# Altium PCB DeejBusinessCard.PcbDoc
Units mm, origin at the board's own origin, x right, y up, seen from the top; angles counter-clockwise.
Board outline 90 x 50 mm, 2 copper layers (Top Layer, Bottom Layer), stack 1.18 mm thick; 106 components, 73 nets, 382 pads, 92 vias.
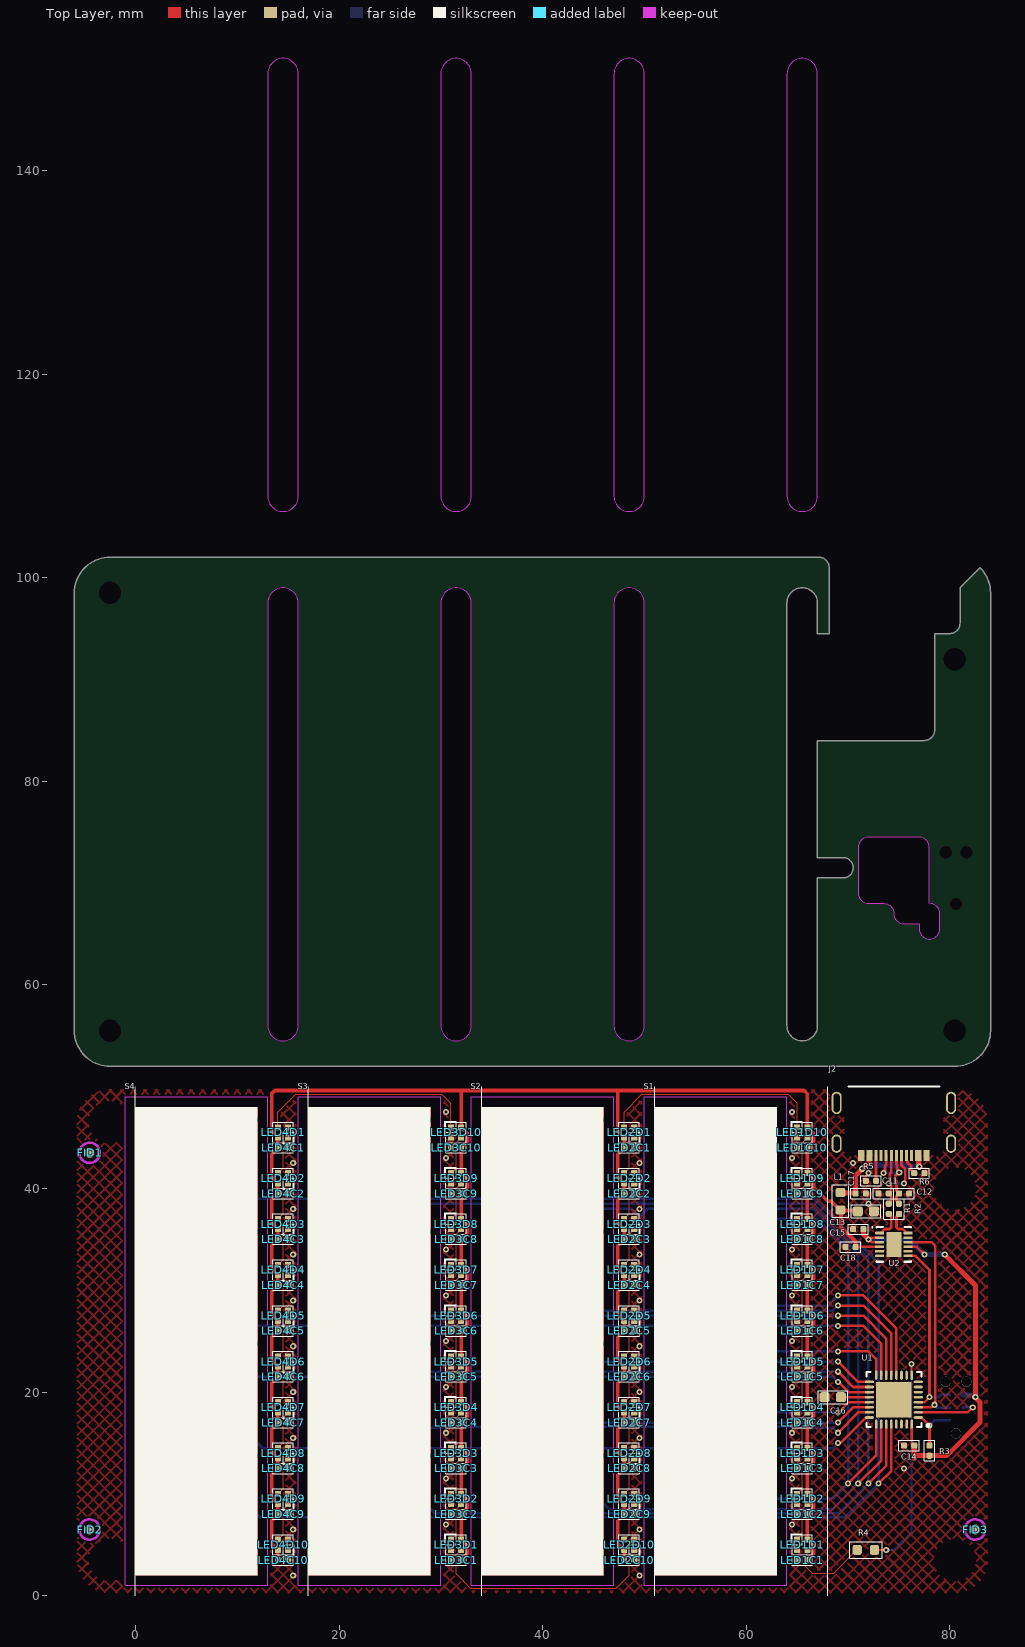
[diagram p0: Top Layer view]
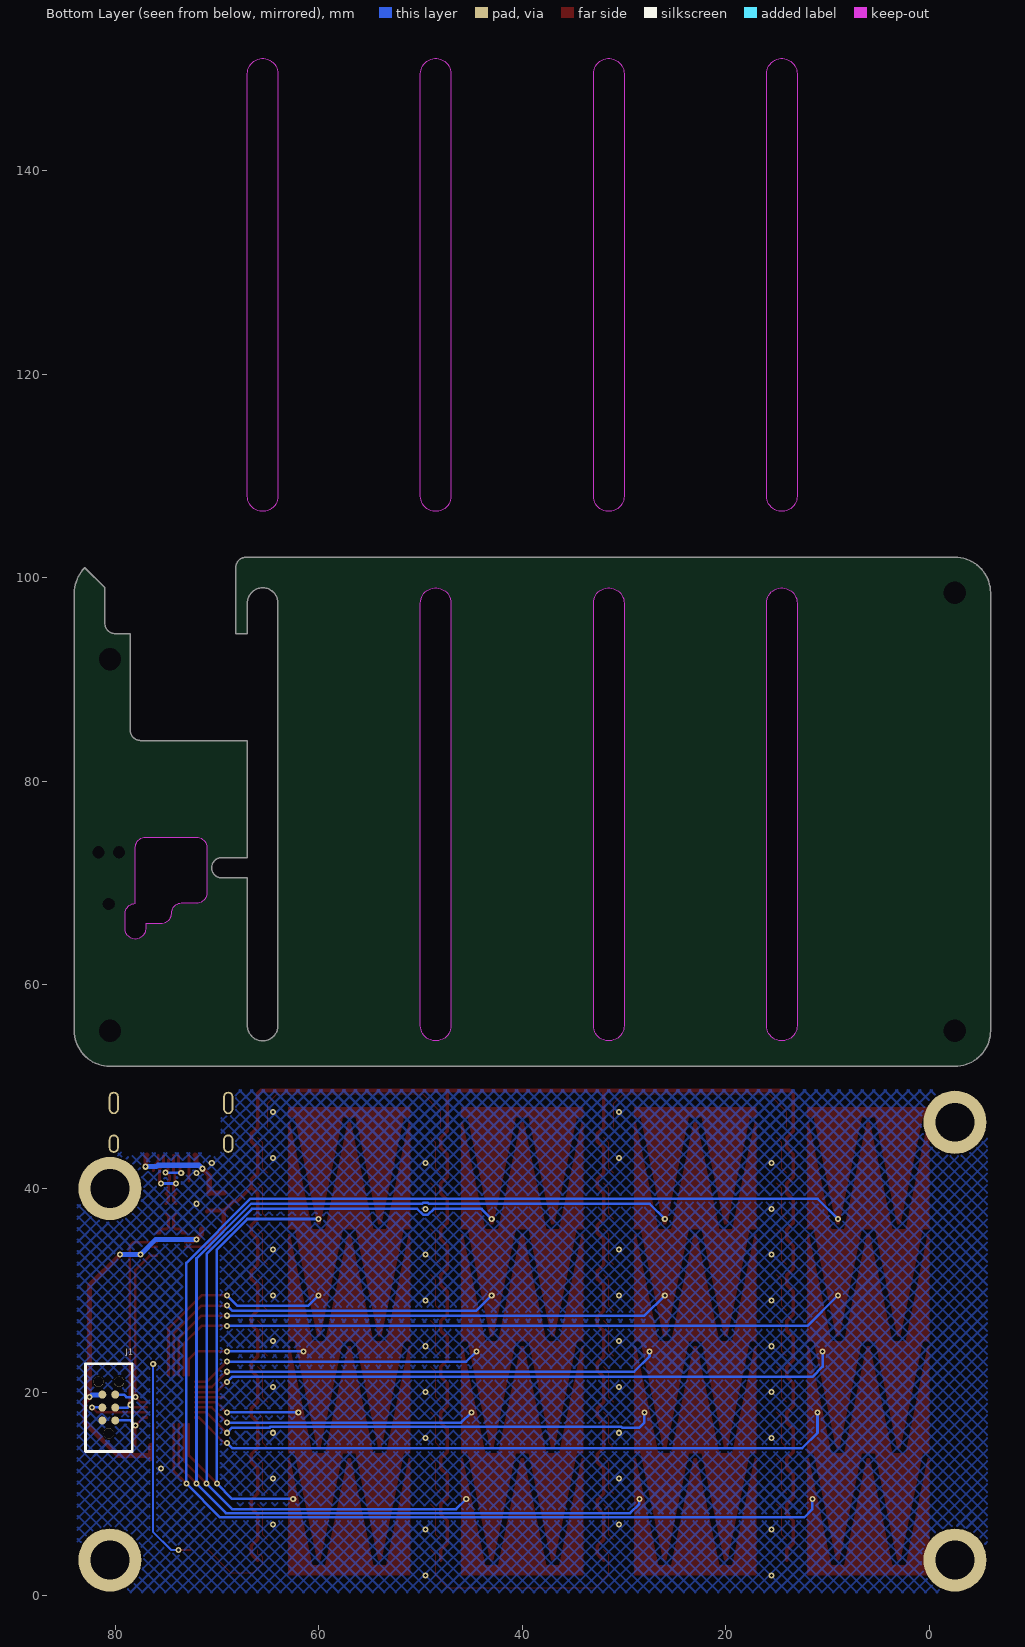
[diagram p1: Bottom Layer view, seen from below]

## Layer stack, top to bottom
Top Solder: solder mask 0.01, Solder Resist, Dk 3.5
Top Layer: signal copper 0.035
Dielectric 2: dielectric 1.11, FR-4, Dk 4.8
Bottom Layer: signal copper 0.035
Bottom Solder: solder mask 0.01, Solder Resist, Dk 3.5

## Board outline
84,55.5 84,98.5 ccw(c80.5,98.5) 82.975,100.975 81,99 81,95.5 cw(c80,95.5) 80,94.5 78.5,94.5 78.5,85 cw(c77.5,85) 77.5,84 67,84 67,72.5 69.5,72.5 cw(c69.5,71.5) 69.5,70.5 67,70.5 67,56 cw(c65.5,56) 64,56 64,97.5 cw(c65.5,97.5) 67,97.5 67,94.5 68.14,94.5 68.14,101 ccw(c67.14,101) 67.14,102 -2.5,102 ccw(c-2.5,98.5) -6,98.5 -6,55.5 ccw(c-2.5,55.5) -2.5,52 80.5,52 ccw(c80.5,55.5)
cut-out: 64,108 ccw(c65.5,108) 67,108 67,149.5 ccw(c65.5,149.5) 64,149.5
cut-out: 47,108 ccw(c48.5,108) 50,108 50,149.5 ccw(c48.5,149.5) 47,149.5
cut-out: 30,108 ccw(c31.5,108) 33,108 33,149.5 ccw(c31.5,149.5) 30,149.5
cut-out: 13,108 ccw(c14.5,108) 16,108 16,149.5 ccw(c14.5,149.5) 13,149.5
cut-out: 13,56 ccw(c14.5,56) 16,56 16,97.5 ccw(c14.5,97.5) 13,97.5
cut-out: 30,56 ccw(c31.5,56) 33,56 33,97.5 ccw(c31.5,97.5) 30,97.5
cut-out: 47,56 ccw(c48.5,56) 50,56 50,97.5 ccw(c48.5,97.5) 47,97.5
cut-out: 71,69 ccw(c72,69) 72,68 73.5,68 cw(c73.5,67) 74.5,67 ccw(c75.5,67) 75.5,66 77,66 77,65.5 ccw(c78,65.5) 79,65.5 79,67 ccw(c78,67) 78,68 78,73.5 ccw(c77,73.5) 77,74.5 72,74.5 ccw(c72,73.5) 71,73.5
board region "Layer Stack Region 3": -6,3.5 -6,46.5 -6,46.729 -5.94,47.184 -5.821,47.627 -5.646,48.051 -5.416,48.449 -5.137,48.813 -4.813,49.137 -4.449,49.416 -4.051,49.646 -3.627,49.821 -3.184,49.94 -2.729,50 -2.5,50 69.88,50 69.88,43.8 69.888,43.722 69.947,43.578 70.058,43.467 70.202,43.408 70.358,43.408 70.502,43.467 70.613,43.578 70.672,43.722 70.68,43.8 78.32,43.8 78.328,43.722 78.387,43.578 78.498,43.467 78.642,43.408 78.798,43.408 78.942,43.467 79.053,43.578 79.112,43.722 79.12,43.8 79.12,50 80.5,50 80.729,50 81.184,49.94 81.627,49.821 82.051,49.646 82.449,49.416 82.813,49.137 83.137,48.813 83.416,48.449 83.646,48.051 83.821,47.627 83.94,47.184 84,46.729 84,46.5 84,3.5 84,3.271 83.94,2.816 83.821,2.373 83.646,1.949 83.416,1.551 83.137,1.187 82.813,0.863 82.449,0.584 82.051,0.354 81.627,0.179 81.184,0.06 80.729,0 80.5,0 -2.5,0 -2.729,0 -3.184,0.06 -3.627,0.179 -4.051,0.354 -4.449,0.584 -4.813,0.863 -5.137,1.187 -5.416,1.551 -5.646,1.949 -5.821,2.373 -5.94,2.816 -6,3.271
board region "Layer Stack Region 2": -6,107.5 -6,107.271 -5.94,106.816 -5.821,106.373 -5.646,105.949 -5.416,105.551 -5.137,105.187 -4.813,104.863 -4.449,104.584 -4.051,104.354 -3.627,104.179 -3.184,104.06 -2.729,104 -2.5,104 80.5,104 80.729,104 81.184,104.06 81.627,104.179 82.051,104.354 82.449,104.584 82.813,104.863 83.137,105.187 83.416,105.551 83.646,105.949 83.821,106.373 83.94,106.816 84,107.271 84,107.5 84,150.5 84,150.729 83.94,151.184 83.821,151.627 83.646,152.051 83.416,152.449 83.137,152.813 82.813,153.137 82.449,153.416 82.051,153.646 81.627,153.821 81.184,153.94 80.729,154 80.5,154 80.12,154 80.022,154 79.828,153.962 79.646,153.886 79.483,153.777 79.343,153.637 79.234,153.474 79.158,153.292 79.12,153.098 79.12,153 79.12,148.3 79.115,148.202 79.077,148.01 79.002,147.829 78.893,147.666 78.754,147.527 78.591,147.418 78.41,147.343 78.218,147.305 78.12,147.3 70.88,147.3 70.782,147.305 70.59,147.343 70.409,147.418 70.246,147.527 70.107,147.666 69.998,147.829 69.923,148.01 69.885,148.202 69.88,148.3 69.88,153 69.88,153.098 69.842,153.292 69.766,153.474 69.657,153.637 69.517,153.777 69.354,153.886 69.172,153.962 68.978,154 68.88,154 -2.5,154 -2.729,154 -3.184,153.94 -3.627,153.821 -4.051,153.646 -4.449,153.416 -4.813,153.137 -5.137,152.813 -5.416,152.449 -5.646,152.051 -5.821,151.627 -5.94,151.184 -6,150.729 -6,150.5
board region "Layer Stack Region 4": 84,55.5 84,98.5 84,98.672 83.966,99.014 83.899,99.351 83.799,99.681 83.668,99.998 83.506,100.302 83.315,100.587 83.096,100.853 82.975,100.975 81,99 81,95.5 80.995,95.402 80.957,95.21 80.882,95.029 80.773,94.866 80.634,94.727 80.471,94.618 80.29,94.543 80.098,94.505 80,94.5 78.5,94.5 78.5,85 78.495,84.902 78.457,84.71 78.382,84.529 78.273,84.366 78.134,84.227 77.971,84.118 77.79,84.043 77.598,84.005 77.5,84 67,84 67,72.5 69.5,72.5 69.631,72.491 69.883,72.424 70.109,72.293 70.293,72.109 70.424,71.883 70.491,71.631 70.491,71.369 70.424,71.117 70.293,70.891 70.109,70.707 69.883,70.576 69.631,70.509 69.5,70.5 67,70.5 67,56 66.993,55.853 66.935,55.565 66.823,55.293 66.66,55.048 66.452,54.84 66.207,54.677 65.935,54.565 65.647,54.507 65.353,54.507 65.065,54.565 64.793,54.677 64.548,54.84 64.34,55.048 64.177,55.293 64.065,55.565 64.007,55.853 64,56 64,97.5 64.007,97.647 64.065,97.935 64.177,98.207 64.34,98.452 64.548,98.66 64.793,98.823 65.065,98.935 65.353,98.993 65.647,98.993 65.935,98.935 66.207,98.823 66.452,98.66 66.66,98.452 66.823,98.207 66.935,97.935 66.993,97.647 67,97.5 67,94.5 68.14,94.5 68.14,101 68.14,101.098 68.102,101.292 68.026,101.474 67.917,101.637 67.777,101.777 67.614,101.886 67.432,101.962 67.238,102 67.14,102 -2.5,102 -2.729,102 -3.184,101.94 -3.627,101.821 -4.051,101.646 -4.449,101.416 -4.813,101.137 -5.137,100.813 -5.416,100.449 -5.646,100.051 -5.821,99.627 -5.94,99.184 -6,98.729 -6,98.5 -6,55.5 -6,55.271 -5.94,54.816 -5.821,54.373 -5.646,53.949 -5.416,53.551 -5.137,53.187 -4.813,52.863 -4.449,52.584 -4.051,52.354 -3.627,52.179 -3.184,52.06 -2.729,52 -2.5,52 80.5,52 80.729,52 81.184,52.06 81.627,52.179 82.051,52.354 82.449,52.584 82.813,52.863 83.137,53.187 83.416,53.551 83.646,53.949 83.821,54.373 83.94,54.816 84,55.271

## Design rules (kind name [scope] priority, off if disabled: settings)
BoardOutlineClearance [All] p1: gap=0.2 ignorepadtopadclearanceinfootprint=FALSE
Clearance [All] p1: gap=0.15 ignorepadtopadclearanceinfootprint=FALSE
DiffPairsRouting [All] p1: maxlimit=0.22 minlimit=0.22 mostfreqgap=0.22 toplayer_minwidth=0.28 toplayer_maxwidth=0.28 toplayer_prefwidth=0.28 bottomlayer_minwidth=0.28 bottomlayer_maxwidth=0.28 bottomlayer_prefwidth=0.28 maxuncoupledlength=12.7
PolygonConnect [All] p1: connectstyle=Direct reliefconductorwidth=0.254 reliefentries=4 polygonreliefangle="90 Angle" airgapwidth=0.254
RoomDefinition LED3 [InComponentClass('LED3')] p1: confinementstyle=ConfineIn formatcopy=FALSE lockcomponents=FALSE outline 30,0 33,0 33,50 30,50
RoomDefinition LED2 [InComponentClass('LED2')] p2: confinementstyle=ConfineIn formatcopy=TRUE lockcomponents=FALSE outline 50,50 47,50 47,0 50,0
RoomDefinition LED4 [InComponentClass('LED4')] p3: confinementstyle=ConfineIn formatcopy=TRUE lockcomponents=FALSE outline 16,50 13,50 13,0 16,0
RoomDefinition LED1 [InComponentClass('LED1')] p4: confinementstyle=ConfineIn formatcopy=FALSE lockcomponents=FALSE outline 64,0 67,0 67,50 64,50
RoutingVias [All] p1: holewidth=0.3 width=0.6 viastyle="Through Hole" minholewidth=0.3 minwidth=0.6 maxholewidth=0.3 maxwidth=0.6
SolderMaskExpansion [All] p1: expansion=0.102 istentingtop=FALSE
Width [All] p1: maxlimit=2.5 minlimit=0.1 preferedwidth=0.3
29 further rules are at their usual default settings.

## Classes and differential pairs
channel class DeejBusinessCard-LEDs: LED1 LED2 LED3 LED4
component class LED4: LED4C1 LED4C2 LED4C3 LED4C4 LED4C5 LED4C6 LED4C7 LED4C8 LED4C9 LED4C10 LED4D1 LED4D2 LED4D3 LED4D4 LED4D5 LED4D6 LED4D7 LED4D8 LED4D9 LED4D10
component class LED3: LED3C1 LED3C2 LED3C3 LED3C4 LED3C5 LED3C6 LED3C7 LED3C8 LED3C9 LED3C10 LED3D1 LED3D2 LED3D3 LED3D4 LED3D5 LED3D6 LED3D7 LED3D8 LED3D9 LED3D10
component class LED2: LED2C1 LED2C2 LED2C3 LED2C4 LED2C5 LED2C6 LED2C7 LED2C8 LED2C9 LED2C10 LED2D1 LED2D2 LED2D3 LED2D4 LED2D5 LED2D6 LED2D7 LED2D8 LED2D9 LED2D10
component class LED1: LED1C1 LED1C2 LED1C3 LED1C4 LED1C5 LED1C6 LED1C7 LED1C8 LED1C9 LED1C10 LED1D1 LED1D2 LED1D3 LED1D4 LED1D5 LED1D6 LED1D7 LED1D8 LED1D9 LED1D10
component class DeejBusinessCard-Top: C11 C12 C13 C14 C15 C16 C17 C18 FID1 FID2 FID3 J1 J2 L1 R1 R2 R3 R4 R5 R6 S1 S2 S3 S4 U1 U2
differential pair D: +D_p -D_n
differential pair DR: +DR_p -DR_n

## Components (designator, comment, footprint, x,y, rotation, side; value= is the part's Value field where it differs from the comment)
C11 "Capacitor_Ceramic" CAPC1005L 73.5,39.5 r0 top value=47pF
C12 "Capacitor_Ceramic" CAPC1005L 75.5,39.5 r180 top value=47pF
C13 "Capacitor_Ceramic" CAPC1608N 71.75,37.75 r180 top value=4.7uF
C14 "Capacitor_Ceramic" CAPC1005L 76,14.75 r180 top value=0.1uF
C15 "Capacitor_Ceramic" CAPC1005L 71,36 r180 top value=0.1uF
C16 "Capacitor_Ceramic" CAPC1608N 68.5,19.5 r0 top value=1uF
C17 "Capacitor_Ceramic" CAPC1005L 71.25,39.5 r180 top value=10nF
C18 "Capacitor_Ceramic" CAPC1005L 70.25,34.25 r180 top value=0.1uF
FID1 "FIDUCIAL" FIDUCIAL_1mm -4.5,43.5 r90 top
FID2 "FIDUCIAL" FIDUCIAL_1mm -4.5,6.5 r90 top
FID3 "FIDUCIAL" FIDUCIAL_1mm 82.5,6.5 r90 top
J1 "CONN_6" "HDR - TC2030-IDC-NL-FP" 80.615,18.48 r90 bottom
J2 "USB4505-03-0-A_REVA" GCT_USB4505-03-0-A_REVA 74.5,50 r180 top
L1 "Inductor" RESC1608N 69.25,38.75 r270 top value=300mΩ
LED1C1 "Capacitor_Ceramic" CAPC1005L 65.5,3.5 r0 top value=0.1uF (schematic designator C1)
LED1C2 "Capacitor_Ceramic" CAPC1005L 65.5,8 r0 top value=0.1uF (schematic designator C2)
LED1C3 "Capacitor_Ceramic" CAPC1005L 65.5,12.5 r0 top value=0.1uF (schematic designator C3)
LED1C4 "Capacitor_Ceramic" CAPC1005L 65.5,17 r0 top value=0.1uF (schematic designator C4)
LED1C5 "Capacitor_Ceramic" CAPC1005L 65.5,21.5 r0 top value=0.1uF (schematic designator C5)
LED1C6 "Capacitor_Ceramic" CAPC1005L 65.5,26 r0 top value=0.1uF (schematic designator C6)
LED1C7 "Capacitor_Ceramic" CAPC1005L 65.5,30.5 r0 top value=0.1uF (schematic designator C7)
LED1C8 "Capacitor_Ceramic" CAPC1005L 65.5,35 r0 top value=0.1uF (schematic designator C8)
LED1C9 "Capacitor_Ceramic" CAPC1005L 65.5,39.5 r0 top value=0.1uF (schematic designator C9)
LED1C10 "Capacitor_Ceramic" CAPC1005L 65.5,44 r0 top value=0.1uF (schematic designator C10)
LED1D1 "IN-PI15TAT5R5G5B" IN-PI15TAT5R5G5B 65.5,5 r90 top (schematic designator D1)
LED1D2 "IN-PI15TAT5R5G5B" IN-PI15TAT5R5G5B 65.5,9.5 r90 top (schematic designator D2)
LED1D3 "IN-PI15TAT5R5G5B" IN-PI15TAT5R5G5B 65.5,14 r90 top (schematic designator D3)
LED1D4 "IN-PI15TAT5R5G5B" IN-PI15TAT5R5G5B 65.5,18.5 r90 top (schematic designator D4)
LED1D5 "IN-PI15TAT5R5G5B" IN-PI15TAT5R5G5B 65.5,23 r90 top (schematic designator D5)
LED1D6 "IN-PI15TAT5R5G5B" IN-PI15TAT5R5G5B 65.5,27.5 r90 top (schematic designator D6)
LED1D7 "IN-PI15TAT5R5G5B" IN-PI15TAT5R5G5B 65.5,32 r90 top (schematic designator D7)
LED1D8 "IN-PI15TAT5R5G5B" IN-PI15TAT5R5G5B 65.5,36.5 r90 top (schematic designator D8)
LED1D9 "IN-PI15TAT5R5G5B" IN-PI15TAT5R5G5B 65.5,41 r90 top (schematic designator D9)
LED1D10 "IN-PI15TAT5R5G5B" IN-PI15TAT5R5G5B 65.5,45.5 r90 top (schematic designator D10)
LED2C1 "Capacitor_Ceramic" CAPC1005L 48.5,44 r180 top value=0.1uF (schematic designator C1)
LED2C2 "Capacitor_Ceramic" CAPC1005L 48.5,39.5 r180 top value=0.1uF (schematic designator C2)
LED2C3 "Capacitor_Ceramic" CAPC1005L 48.5,35 r180 top value=0.1uF (schematic designator C3)
LED2C4 "Capacitor_Ceramic" CAPC1005L 48.5,30.5 r180 top value=0.1uF (schematic designator C4)
LED2C5 "Capacitor_Ceramic" CAPC1005L 48.5,26 r180 top value=0.1uF (schematic designator C5)
LED2C6 "Capacitor_Ceramic" CAPC1005L 48.5,21.5 r180 top value=0.1uF (schematic designator C6)
LED2C7 "Capacitor_Ceramic" CAPC1005L 48.5,17 r180 top value=0.1uF (schematic designator C7)
LED2C8 "Capacitor_Ceramic" CAPC1005L 48.5,12.5 r180 top value=0.1uF (schematic designator C8)
LED2C9 "Capacitor_Ceramic" CAPC1005L 48.5,8 r180 top value=0.1uF (schematic designator C9)
LED2C10 "Capacitor_Ceramic" CAPC1005L 48.5,3.5 r180 top value=0.1uF (schematic designator C10)
LED2D1 "IN-PI15TAT5R5G5B" IN-PI15TAT5R5G5B 48.5,45.5 r270 top (schematic designator D1)
LED2D2 "IN-PI15TAT5R5G5B" IN-PI15TAT5R5G5B 48.5,41 r270 top (schematic designator D2)
LED2D3 "IN-PI15TAT5R5G5B" IN-PI15TAT5R5G5B 48.5,36.5 r270 top (schematic designator D3)
LED2D4 "IN-PI15TAT5R5G5B" IN-PI15TAT5R5G5B 48.5,32 r270 top (schematic designator D4)
LED2D5 "IN-PI15TAT5R5G5B" IN-PI15TAT5R5G5B 48.5,27.5 r270 top (schematic designator D5)
LED2D6 "IN-PI15TAT5R5G5B" IN-PI15TAT5R5G5B 48.5,23 r270 top (schematic designator D6)
LED2D7 "IN-PI15TAT5R5G5B" IN-PI15TAT5R5G5B 48.5,18.5 r270 top (schematic designator D7)
LED2D8 "IN-PI15TAT5R5G5B" IN-PI15TAT5R5G5B 48.5,14 r270 top (schematic designator D8)
LED2D9 "IN-PI15TAT5R5G5B" IN-PI15TAT5R5G5B 48.5,9.5 r270 top (schematic designator D9)
LED2D10 "IN-PI15TAT5R5G5B" IN-PI15TAT5R5G5B 48.5,5 r270 top (schematic designator D10)
LED3C1 "Capacitor_Ceramic" CAPC1005L 31.5,3.5 r0 top value=0.1uF (schematic designator C1)
LED3C2 "Capacitor_Ceramic" CAPC1005L 31.5,8 r0 top value=0.1uF (schematic designator C2)
LED3C3 "Capacitor_Ceramic" CAPC1005L 31.5,12.5 r0 top value=0.1uF (schematic designator C3)
LED3C4 "Capacitor_Ceramic" CAPC1005L 31.5,17 r0 top value=0.1uF (schematic designator C4)
LED3C5 "Capacitor_Ceramic" CAPC1005L 31.5,21.5 r0 top value=0.1uF (schematic designator C5)
LED3C6 "Capacitor_Ceramic" CAPC1005L 31.5,26 r0 top value=0.1uF (schematic designator C6)
LED3C7 "Capacitor_Ceramic" CAPC1005L 31.5,30.5 r0 top value=0.1uF (schematic designator C7)
LED3C8 "Capacitor_Ceramic" CAPC1005L 31.5,35 r0 top value=0.1uF (schematic designator C8)
LED3C9 "Capacitor_Ceramic" CAPC1005L 31.5,39.5 r0 top value=0.1uF (schematic designator C9)
LED3C10 "Capacitor_Ceramic" CAPC1005L 31.5,44 r0 top value=0.1uF (schematic designator C10)
LED3D1 "IN-PI15TAT5R5G5B" IN-PI15TAT5R5G5B 31.5,5 r90 top (schematic designator D1)
LED3D2 "IN-PI15TAT5R5G5B" IN-PI15TAT5R5G5B 31.5,9.5 r90 top (schematic designator D2)
LED3D3 "IN-PI15TAT5R5G5B" IN-PI15TAT5R5G5B 31.5,14 r90 top (schematic designator D3)
LED3D4 "IN-PI15TAT5R5G5B" IN-PI15TAT5R5G5B 31.5,18.5 r90 top (schematic designator D4)
LED3D5 "IN-PI15TAT5R5G5B" IN-PI15TAT5R5G5B 31.5,23 r90 top (schematic designator D5)
LED3D6 "IN-PI15TAT5R5G5B" IN-PI15TAT5R5G5B 31.5,27.5 r90 top (schematic designator D6)
LED3D7 "IN-PI15TAT5R5G5B" IN-PI15TAT5R5G5B 31.5,32 r90 top (schematic designator D7)
LED3D8 "IN-PI15TAT5R5G5B" IN-PI15TAT5R5G5B 31.5,36.5 r90 top (schematic designator D8)
LED3D9 "IN-PI15TAT5R5G5B" IN-PI15TAT5R5G5B 31.5,41 r90 top (schematic designator D9)
LED3D10 "IN-PI15TAT5R5G5B" IN-PI15TAT5R5G5B 31.5,45.5 r90 top (schematic designator D10)
LED4C1 "Capacitor_Ceramic" CAPC1005L 14.5,44 r180 top value=0.1uF (schematic designator C1)
LED4C2 "Capacitor_Ceramic" CAPC1005L 14.5,39.5 r180 top value=0.1uF (schematic designator C2)
LED4C3 "Capacitor_Ceramic" CAPC1005L 14.5,35 r180 top value=0.1uF (schematic designator C3)
LED4C4 "Capacitor_Ceramic" CAPC1005L 14.5,30.5 r180 top value=0.1uF (schematic designator C4)
LED4C5 "Capacitor_Ceramic" CAPC1005L 14.5,26 r180 top value=0.1uF (schematic designator C5)
LED4C6 "Capacitor_Ceramic" CAPC1005L 14.5,21.5 r180 top value=0.1uF (schematic designator C6)
LED4C7 "Capacitor_Ceramic" CAPC1005L 14.5,17 r180 top value=0.1uF (schematic designator C7)
LED4C8 "Capacitor_Ceramic" CAPC1005L 14.5,12.5 r180 top value=0.1uF (schematic designator C8)
LED4C9 "Capacitor_Ceramic" CAPC1005L 14.5,8 r180 top value=0.1uF (schematic designator C9)
LED4C10 "Capacitor_Ceramic" CAPC1005L 14.5,3.5 r180 top value=0.1uF (schematic designator C10)
LED4D1 "IN-PI15TAT5R5G5B" IN-PI15TAT5R5G5B 14.5,45.5 r270 top (schematic designator D1)
LED4D2 "IN-PI15TAT5R5G5B" IN-PI15TAT5R5G5B 14.5,41 r270 top (schematic designator D2)
LED4D3 "IN-PI15TAT5R5G5B" IN-PI15TAT5R5G5B 14.5,36.5 r270 top (schematic designator D3)
LED4D4 "IN-PI15TAT5R5G5B" IN-PI15TAT5R5G5B 14.5,32 r270 top (schematic designator D4)
LED4D5 "IN-PI15TAT5R5G5B" IN-PI15TAT5R5G5B 14.5,27.5 r270 top (schematic designator D5)
LED4D6 "IN-PI15TAT5R5G5B" IN-PI15TAT5R5G5B 14.5,23 r270 top (schematic designator D6)
LED4D7 "IN-PI15TAT5R5G5B" IN-PI15TAT5R5G5B 14.5,18.5 r270 top (schematic designator D7)
LED4D8 "IN-PI15TAT5R5G5B" IN-PI15TAT5R5G5B 14.5,14 r270 top (schematic designator D8)
LED4D9 "IN-PI15TAT5R5G5B" IN-PI15TAT5R5G5B 14.5,9.5 r270 top (schematic designator D9)
LED4D10 "IN-PI15TAT5R5G5B" IN-PI15TAT5R5G5B 14.5,5 r270 top (schematic designator D10)
R1 "Resistor" RESC1005L 74,38 r270 top value=27Ω
R2 "Resistor" RESC1005L 75,38 r270 top value=27Ω
R3 "Resistor" RESC1005L 78,14.25 r270 top value=10kΩ
R4 "Resistor" RESC1608N 71.75,4.5 r180 top value=100Ω
R5 "Resistor" RESC1005L 72.25,40.75 r0 top value=5.1kΩ
R6 "Resistor" RESC1005L 77,41.5 r180 top value=5.1kΩ
S1 "Component_1" SLIDER-4-38-13 51,2 r90 top locked
S2 "Component_1" SLIDER-4-38-13 34,2 r90 top locked
S3 "Component_1" SLIDER-4-38-13 17,2 r90 top locked
S4 "Component_1" SLIDER-4-38-13 0,2 r90 top locked
U1 "MSP430FR2633/cap" QFN50P500X500X100_HS-33N 74.5,19.25 r180 top
U2 "FT234XD" SON45P300X80_HS-13N 74.5,34.5 r0 top

## Footprints (in the part's own frame and the unit in brackets; to place one, negate y for a bottom-side part, rotate by r counter-clockwise, add the part's x,y. Pads: shape width x height; smd on the part's side, far side on the other; paste and mask are expansions set on the pad)
CAPC1005L [mm] "Chip Capacitor, Body 1.0x0.5mm, IPC High Density"
  rrect50% 0.6x0.6 smd: 1(-0.5,0) 2(0.5,0)
  silkscreen extent -1,-0.5 1,0.5, body extent -0.5,-0.25 0.5,0.25, height 0.51
CAPC1608N [mm] "Chip Capacitor, Body 1.6x0.8mm, IPC Medium Density"
  rrect50% 1x1 smd: 1(-0.8,0) 2(0.8,0)
  silkscreen extent -1.45,-0.65 1.45,0.65, body extent -0.8,-0.4 0.8,0.4, height 0.81
FIDUCIAL_1mm [mm]
  round 1 smd paste+0 mask+0.5: 0(0,0)
  Top Layer keep-out circle w0.254: c0,0 r1
GCT_USB4505-03-0-A_REVA [mm]
  oval 1x1.8 hole 0.6 slot 1.4 at 90 deg: 0(-5.62,5.6) 0(5.62,5.6)
  oval 1x2.2 hole 0.6 slot 1.8 at 90 deg: 0(-5.62,1.6) 0(5.62,1.6)
  rect 0.6x1.1 smd: A1_B12(-3.2,6.75) A4_B9(-2.4,6.75) B1_A12(3.2,6.75) B4_A9(2.4,6.75)
  rect 0.3x1.1 smd: A5(-1.25,6.75) A6(-0.25,6.75) A7(0.25,6.75) A8(1.25,6.75) B5(1.75,6.75) B6(0.75,6.75) B7(-0.75,6.75) B8(-1.75,6.75)
  silkscreen extent -4.47,0 4.47,0, body extent -5.77,-0.5 5.77,6.7, height 2.16
"HDR - TC2030-IDC-NL-FP" [mil] "PLUG-OF-NAILS CABLE CONNECTOR"
  round 31 smd paste-16: 1(-50,-25) 2(-50,25) 3(0,-25) 4(0,25) 5(50,-25) 6(50,25)
  round 39.02 hole 39.02 unplated: ""(-100,0) ""(100,-40) ""(100,40)
  silkscreen extent -170,-90 170,90
IN-PI15TAT5R5G5B [mm]
  rrect25% 0.6x0.6 smd: 1(-0.5,-0.5) 2(0.5,-0.5) 3(0.5,0.5) 4(-0.5,0.5)
  silkscreen extent -1,-1 1.1,1.1, body extent -0.75,-0.75 0.75,0.75, height 0.65
QFN50P500X500X100_HS-33N [mm] "QFN, 32-Leads, Body 5.00x5.00mm, Pitch 0.50mm, Thermal Pad 3.50x3.50mm, IPC Medium Density"
  oval 0.9x0.25 smd: 1(-2.4,1.75) 2(-2.4,1.25) 3(-2.4,0.75) 4(-2.4,0.25) 5(-2.4,-0.25) 6(-2.4,-0.75) 7(-2.4,-1.25) 8(-2.4,-1.75) 17(2.4,-1.75) 18(2.4,-1.25) 19(2.4,-0.75) 20(2.4,-0.25) 21(2.4,0.25) 22(2.4,0.75) 23(2.4,1.25) 24(2.4,1.75)
  oval 0.25x0.9 smd: 9(-1.75,-2.4) 10(-1.25,-2.4) 11(-0.75,-2.4) 12(-0.25,-2.4) 13(0.25,-2.4) 14(0.75,-2.4) 15(1.25,-2.4) 16(1.75,-2.4) 25(1.75,2.4) 26(1.25,2.4) 27(0.75,2.4) 28(0.25,2.4) 29(-0.25,2.4) 30(-0.75,2.4) 31(-1.25,2.4) 32(-1.75,2.4)
  rect 3.5x3.5 smd: 33(0,0)
  silkscreen extent -3.48,-2.7 2.7,2.7, body extent -2.55,-2.55 2.55,2.55, height 1
RESC1005L [mm] "Chip Resistor, Body 1.1x0.5mm, IPC High Density"
  rrect50% 0.6x0.6 smd: 1(-0.5,0) 2(0.5,0)
  silkscreen extent -1,-0.5 1,0.5, body extent -0.52,-0.3 0.52,0.3, height 0.34
RESC1608N [mm] "Chip Resistor, Body 1.6x0.8mm, IPC Medium Density"
  rrect50% 0.9x1 smd: 1(-0.85,0) 2(0.85,0)
  silkscreen extent -1.6,-0.8 1.6,0.8, body extent -0.8,-0.4 0.84,0.45, height 0.46
SLIDER-4-38-13 [mm]
  round 0.3 smd paste-20 mask+0.102: 1(5.753,-6) 1(45.5,-6) 2(15,-6) 3(26,-6) 4(37,-6)
  Top Layer region: 33.995,-12 33.995,-11.35 23.495,-9.15 23.495,-8.85 33.995,-6.65 33.995,-5.35 23.495,-3.15 23.495,-2.85 33.995,-0.65 33.995,0 44.505,0 44.505,-0.15 34.005,-2.35 34.005,-3.65 44.505,-5.85 44.505,-6.15 34.005,-8.35 34.005,-9.65 44.505,-11.85 44.505,-12
  Top Layer region: 22.995,-12 22.995,-11.35 12.495,-9.15 12.495,-8.85 22.995,-6.65 22.995,-5.35 12.495,-3.15 12.495,-2.85 22.995,-0.65 22.995,0 33.505,0 33.505,-0.15 23.005,-2.35 23.005,-3.65 33.505,-5.85 33.505,-6.15 23.005,-8.35 23.005,-9.65 33.505,-11.85 33.505,-12
  Top Layer region: 1.495,-9.15 11.995,-11.35 11.995,-12 22.505,-12 22.505,-11.85 12.005,-9.65 12.005,-8.35 22.505,-6.15 22.505,-5.85 12.005,-3.65 12.005,-2.35 22.505,-0.15 22.505,0 11.995,0 11.995,-0.65 1.495,-2.85 1.495,-3.15 11.995,-5.35 11.995,-6.65 1.495,-8.85
  Top Layer region: 1,-9.65 1,-8.35 1.005,-8.35 11.505,-6.15 11.505,-5.85 1.005,-3.65 1,-3.65 1,-2.35 1.005,-2.35 11.505,-0.15 11.505,0 0,0 0,-12 11.505,-12 11.505,-11.85 1.005,-9.65
  Top Layer region: 34.495,-9.15 44.995,-11.35 45,-11.35 45,-12 46,-12 46,0 45,0 45,-0.65 44.995,-0.65 34.495,-2.85 34.495,-3.15 44.995,-5.35 45,-5.35 45,-6.65 44.995,-6.65 34.495,-8.85
  Top Layer keep-out lines w0.1: -1,1 47,1 47,-13 -1,-13 -1,1
SON45P300X80_HS-13N [mm] "SON, 12-Leads, Body 3.00x3.00mm, Pitch 0.45mm, Thermal Pad 2.48x1.49mm, IPC Medium Density"
  rrect50% 0.9x0.25 smd: 1(-1.395,1.125) 2(-1.395,0.675) 3(-1.395,0.225) 4(-1.395,-0.225) 5(-1.395,-0.675) 6(-1.395,-1.125) 7(1.395,-1.125) 8(1.395,-0.675) 9(1.395,-0.225) 10(1.395,0.225) 11(1.395,0.675) 12(1.395,1.125)
  rect 1.49x2.48 smd: 13(0,0)
  silkscreen extent -2.15,-1.7 1.7,1.75, body extent -1.55,-1.55 1.55,1.55, height 0.8

## Part data
C11 C12: library part CL05C470JB5NNNC, "CAP CER 47PF 50V C0G/NP0 0402", Case/Package=0402, Manufacturer 1="Samsung Electro-Mechanics", Supplier Part Number 1=1276-1699-1-ND, Voltage=50V, Manufacturer Part Number 1=CL05C470JB5NNNC, Part Number=CL05C470JB5NNNC
C13: library part GRM188Z71C475KE21J, "CAP CER 4.7UF 16V X7R 0603", Case/Package=0603, Manufacturer 1=Murata, Supplier Part Number 1=490-GRM188Z71C475KE21JCT-ND, Voltage=16V, Manufacturer Part Number 1=GRM188Z71C475KE21J, Part Number=GRM188Z71C475KE21J, Supplier 1=Digi-Key
C14 C15 C18 LED1C1 LED1C2 LED1C3 LED1C4 LED1C5 LED1C6 LED1C7 LED1C8 LED1C9 LED1C10 LED2C1 LED2C2 LED2C3 LED2C4 LED2C5 LED2C6 LED2C7 LED2C8 LED2C9 LED2C10 LED3C1 LED3C2 LED3C3 LED3C4 LED3C5 LED3C6 LED3C7 LED3C8 LED3C9 LED3C10 LED4C1 LED4C2 LED4C3 LED4C4 LED4C5 LED4C6 LED4C7 LED4C8 LED4C9 LED4C10: library part CC0402KRX7R7BB104, "CAP CER 0.1UF 16V X7R 0402", Case/Package=0402, Manufacturer 1=Yageo, Supplier Part Number 1=311-1338-1-ND, Voltage=16V, Manufacturer Part Number 1=CC0402KRX7R7BB104, Part Number=CC0402KRX7R7BB104
C16: library part CC0603JRX7R7BB105, "CAP CER 1UF 16V X7R 0603", Case/Package=0603, Manufacturer 1=Yageo, Supplier Part Number 1=311-3485-1-ND, Voltage=16V, Manufacturer Part Number 1=CC0603JRX7R7BB105, Part Number=CC0603JRX7R7BB105, Supplier 1=Digi-Key
C17: library part CC0402JRX7R9BB103, "CAP CER 10000PF 50V X7R 0402", Case/Package=0402, Manufacturer 1=Yageo, Supplier Part Number 1=311-3339-1-ND, Voltage=50V, Manufacturer Part Number 1=CC0402JRX7R9BB103, Part Number=CC0402JRX7R9BB103
FID1 FID2 FID3: "1MM Fiducial"
J1: library part "Header GENERIC 6pin POGO", Part Number="Header GENERIC 6pin POGO"
J2: "USB-C (USB TYPE-C) USB 2.0 Receptacle Connector 24 (16+8 Dummy) Position Board Edge, Cutout; Surface Mount; Through Hole, Right Angle", Package=None, Availability="In Stock", Check_prices=https://www.snapeda.com/parts/USB4505-03-0-A/Global+Connector+Technology/view-part/?ref=eda, MF="Global Connector Technology", MP=USB4505-03-0-A, Price=None, Purchase-URL=https://pricing.snapeda.com/search/part/USB4505-03-0-A/?ref=eda, SnapEDA_Link=https://www.snapeda.com/parts/USB4505-03-0-A/Global+Connector+Technology/view-part/?ref=snap
L1: library part 742792662, "FERRITE BEAD 1K OHM 0603 1LN", Case/Package=0603, Current=600mA, Manufacturer 1="Würth Elektronik", Manufacturer Part Number 1=742792662, Part Number=742792662, Supplier 1=Digi-Key
LED1D1 LED1D2 LED1D3 LED1D4 LED1D5 LED1D6 LED1D7 LED1D8 LED1D9 LED1D10 LED2D1 LED2D2 LED2D3 LED2D4 LED2D5 LED2D6 LED2D7 LED2D8 LED2D9 LED2D10 LED3D1 LED3D2 LED3D3 LED3D4 LED3D5 LED3D6 LED3D7 LED3D8 LED3D9 LED3D10 LED4D1 LED4D2 LED4D3 LED4D4 LED4D5 LED4D6 LED4D7 LED4D8 LED4D9 LED4D10: "Addressable Lighting - 1 LED Discrete Red, Green, Blue (RGB) 1.50mm L x 1.50mm W", Manufacturer=Inolux, Supplier Part Number 1=1830-IN-PI15TAT5R5G5BCT-ND, Part Number=IN-PI15TAT5R5G5B, PCB Footprint=1515, RoHS=Yes, Supplier 1=Digikey, Unit=EA
R1 R2: library part RES0402F27R0, "Resistor, 27Ω, 1%, 0.05W, 0402", Case/Package=0402, Manufacturer 1=Yageo, Manufacturer Part Number 1=RC0402FR-0727RL, Part Number=RES0402F27R0
R3: library part RES0402F10K0, "Resistor, 10kΩ, 1%, 0.05W, 0402", Case/Package=0402, Manufacturer 1=Yageo, Manufacturer Part Number 1=RC0402FR-0710KL, Part Number=RES0402F10K0
R4: library part RES0603F100R, "Resistor, 100Ω, 1%, 0.1W, 0603", Case/Package=0603, Manufacturer 1=Yageo, Manufacturer Part Number 1=RC0603FR-07100RL, Part Number=RES0603F100R
R5 R6: library part RES0402F5K10, "Resistor, 5.1kΩ, 1%, 0.05W, 0402", Case/Package=0402, Manufacturer 1=Yageo, Manufacturer Part Number 1=RC0402FR-075K1L, Part Number=RES0402F5K10
U1: library part MSP430FR2633, "IC MCU 16BIT 15.5KB FRAM 32VQFN", Case/Package=QFN-32, Manufacturer 1="Texas Instruments", Manufacturer Part Number 1=MSP430FR2633IRHBR, Supplier Part Number 1=296-48937-1-ND, Part Number=MSP430FR2633, Supplier 1=Digi-Key
U2: "IC USB SERIAL BASIC UART 12DFN"

## Free pads (board coordinates)
  round 0 / inner round 0 / far side round 6.2 hole 3.8 unplated: 0(-2.5,3.5) 0(-2.5,46.5) 0(80.5,40) 0(80.5,3.5)
  round 0 hole 2.2 unplated: 0(80.5,55.5) 14(80.5,92) 15(-2.5,55.5) 16(-2.5,98.5) 17(-2.5,107.5) 18(-2.5,150.5) 19(80.5,144) 20(80.5,107.5)
  round 0 hole 1.2 unplated: 21(80.615,119.94) 22(79.599,125.02) 23(81.631,125.02) 24(79.599,73.02) 25(81.631,73.02) 26(80.615,67.94)

## Via types
v1: diameter 0.6, hole 0.3, Top Layer to Bottom Layer, tented both sides, 92 vias

## Nets (pads, with @x,y where several pads share a name; then routed paths per layer and width w, separated by ;. In a path a pad name is that pad's centre, name@x,y a point inside that pad or via, vN(x,y) a via of type N, cw(c..) or ccw(c..) an arc to the next point about the centre after c; other vN are vias at no path point)
+3V3: C14.1 C15.1 J1.6 R3.2 U1.32 U2.2 U2.3 U2.9 | length 44
  Top Layer w0.25: v1(72,35) 72.033,35 72.308,34.725 U2.3 ; 72.27,35.175 U2.2 ; U2.9 76.725,34.275 v1(77.5,33.5) ; U1.32 76.25,15.014 76.5,14.764 C14.1
  Top Layer w0.5: C15.1 71.5,35.5 v1(72,35) ; C14.1 76.5,13.5 76.75,13.75 79.691,13.75 82.95,17.009 82.95,19.023 82.5,19.473 v1(82.5,19.5) 82.519,19.519 82.519,20.546 82.526,20.554 82.526,30.474 v1(79.5,33.5)
  Bottom Layer w0.5: v1(72,35) 76,35 v1(77.5,33.5) v1(79.5,33.5) ; J1.6 81.305,19.695 82.305,19.695 v1(82.5,19.5)
+5V0: C13.2 C18.1 L1.2 LED1C1.2 LED1C2.2 LED1C3.2 LED1C4.2 LED1C5.2 LED1C6.2 LED1C7.2 LED1C8.2 LED1C9.2 LED1C10.2 LED1D1.2 LED1D2.2 LED1D3.2 LED1D4.2 LED1D5.2 LED1D6.2 LED1D7.2 LED1D8.2 LED1D9.2 LED1D10.2 LED2C1.2 LED2C2.2 LED2C3.2 LED2C4.2 LED2C5.2 LED2C6.2 LED2C7.2 LED2C8.2 LED2C9.2 LED2C10.2 LED2D1.2 LED2D2.2 LED2D3.2 LED2D4.2 LED2D5.2 LED2D6.2 LED2D7.2 LED2D8.2 LED2D9.2 LED2D10.2 LED3C1.2 LED3C2.2 LED3C3.2 LED3C4.2 LED3C5.2 LED3C6.2 LED3C7.2 LED3C8.2 LED3C9.2 LED3C10.2 LED3D1.2 LED3D2.2 LED3D3.2 LED3D4.2 LED3D5.2 LED3D6.2 LED3D7.2 LED3D8.2 LED3D9.2 LED3D10.2 LED4C1.2 LED4C2.2 LED4C3.2 LED4C4.2 LED4C5.2 LED4C6.2 LED4C7.2 LED4C8.2 LED4C9.2 LED4C10.2 LED4D1.2 LED4D2.2 LED4D3.2 LED4D4.2 LED4D5.2 LED4D6.2 LED4D7.2 LED4D8.2 LED4D9.2 LED4D10.2 U2.4 | length 269.2
  Top Layer w0.25: C18.1 70.775,34.275 U2.4
  Top Layer w0.35: LED4C10.2 LED4D10.2 13.628,4.872 13.612,4.872 13.375,5.109 13.375,7.375 LED4C9.2 LED4D9.2 13.628,9.372 13.612,9.372 13.375,9.609 13.375,11.875 LED4C8.2 LED4D8.2 13.628,13.872 13.612,13.872 13.375,14.109 13.375,16.375 LED4C7.2 LED4D7.2 13.628,18.372 13.612,18.372 13.375,18.609 13.375,20.875 LED4C6.2 LED4D6.2 13.628,22.872 13.612,22.872 13.375,23.109 13.375,25.375 LED4C5.2 LED4D5.2 13.628,27.372 13.612,27.372 13.375,27.609 13.375,29.875 LED4C4.2 LED4D4.2 13.628,31.872 13.612,31.872 13.375,32.109 13.375,34.375 LED4C3.2 LED4D3.2 13.628,36.372 13.612,36.372 13.375,36.609 13.375,38.875 LED4C2.2 LED4D2.2 13.628,40.872 13.612,40.872 13.375,41.109 13.375,43.375 LED4C1.2 LED4D1.2 13.875,45.125 13.628,45.372 13.612,45.372 13.375,45.609 13.375,49.295 13.705,49.625 47.5,49.625 ; LED3C1.2 32.3,3.8 32.316,3.8 32.625,4.109 32.625,4.891 32.141,5.375 32.125,5.375 LED3D1.2 LED3C2.2 32.372,8.372 32.388,8.372 32.625,8.609 32.625,9.391 32.391,9.625 32.375,9.625 LED3D2.2 LED3C3.2 32.372,12.872 32.388,12.872 32.625,13.109 32.625,13.891 32.391,14.125 32.375,14.125 LED3D3.2 LED3C4.2 32.372,17.372 32.388,17.372 32.625,17.609 32.625,18.391 32.391,18.625 32.375,18.625 LED3D4.2 LED3C5.2 32.372,21.872 32.388,21.872 32.625,22.109 32.625,22.891 32.391,23.125 32.375,23.125 LED3D5.2 LED3C6.2 32.372,26.372 32.388,26.372 32.625,26.609 32.625,27.391 32.391,27.625 32.375,27.625 LED3D6.2 LED3C7.2 32.372,30.872 32.388,30.872 32.625,31.109 32.625,31.891 32.391,32.125 32.375,32.125 LED3D7.2 LED3C8.2 32.372,35.372 32.388,35.372 32.625,35.609 32.625,36.391 32.391,36.625 32.375,36.625 LED3D8.2 LED3C9.2 32.372,39.872 32.388,39.872 32.625,40.109 32.625,40.891 32.141,41.375 32.125,41.375 LED3D9.2 LED3C10.2 32.372,44.372 32.388,44.372 32.625,44.609 32.625,45.391 32.391,45.625 32.375,45.625 LED3D10.2 32,49.5 ; 47.375,49.42 47.375,45.609 47.612,45.372 47.628,45.372 47.875,45.125 LED2D1.2 LED2C1.2 47.375,43.375 47.375,41.109 47.612,40.872 47.628,40.872 LED2D2.2 LED2C2.2 47.375,38.875 47.375,36.609 47.612,36.372 47.628,36.372 LED2D3.2 LED2C3.2 47.375,34.375 47.375,32.109 47.612,31.872 47.628,31.872 LED2D4.2 LED2C4.2 47.375,29.875 47.375,27.609 47.612,27.372 47.628,27.372 LED2D5.2 LED2C5.2 47.375,25.375 47.375,23.109 47.612,22.872 47.628,22.872 LED2D6.2 LED2C6.2 47.375,20.875 47.375,18.609 47.612,18.372 47.628,18.372 LED2D7.2 LED2C7.2 47.375,16.375 47.375,14.109 47.612,13.872 47.628,13.872 LED2D8.2 LED2C8.2 47.375,11.875 47.375,9.609 47.612,9.372 47.628,9.372 LED2D9.2 LED2C9.2 47.375,7.375 47.375,5.109 47.612,4.872 47.628,4.872 LED2D10.2 LED2C10.2 ; 47.375,49.5 47.5,49.625 ; LED1C1.2 66.3,3.8 66.316,3.8 66.625,4.109 66.625,4.891 66.141,5.375 66.125,5.375 LED1D1.2 LED1C2.2 66.372,8.372 66.388,8.372 66.625,8.609 66.625,9.391 66.391,9.625 66.375,9.625 LED1D2.2 LED1C3.2 66.372,12.872 66.388,12.872 66.625,13.109 66.625,13.891 66.391,14.125 66.375,14.125 LED1D3.2 LED1C4.2 66.372,17.372 66.388,17.372 66.625,17.609 66.625,18.391 66.391,18.625 66.375,18.625 LED1D4.2 LED1C5.2 66.372,21.872 66.388,21.872 66.625,22.109 66.625,22.891 66.391,23.125 66.375,23.125 LED1D5.2 LED1C6.2 66.372,26.372 66.388,26.372 66.625,26.609 66.625,27.391 66.391,27.625 66.375,27.625 LED1D6.2 LED1C7.2 66.372,30.872 66.388,30.872 66.625,31.109 66.625,31.891 66.391,32.125 66.375,32.125 LED1D7.2 LED1C8.2 66.372,35.372 66.388,35.372 66.625,35.609 66.625,36.391 66.391,36.625 66.375,36.625 LED1D8.2 LED1C9.2 66.372,39.872 66.388,39.872 66.625,40.109 ; L1.2 69.2,37.9 68.358,38.742 67.992,38.742 66.625,40.109 ; 47.5,49.625 65.67,49.625 66,49.295 LED1D10.2 66.375,45.625 66.391,45.625 66.625,45.391 66.625,44.609 66.388,44.372 66.372,44.372 LED1C10.2 LED1D9.2 66.125,41.375 66.141,41.375 66.625,40.891 66.625,40.109
  Top Layer w0.4: L1.2 L1.2@69.325,37.825 ; C18.1 70.716,34.284 70.716,34.777 69.325,36.168 L1.2@69.325,37.825 ; C13.2 70.875,37.825 L1.2@69.325,37.825
+VUSB: C17.2 J2.A4_B9 J2.B4_A9 L1.1 | length 13
  Top Layer w0.5: L1.1 69.3,39.55 70.7,39.55 C17.2 70.75,41.284 72.05,42.584 72.05,43.2 J2.B4_A9 J2.B4_A9@72.15,43.3 ; J2.A4_B9@76.85,43.3 J2.A4_B9 76.95,43.2 76.95,42.214 77,42.164 v1(77,42.137)
  Bottom Layer w0.5: v1(71.392,41.94) 71.42,41.94 71.756,42.277 75.786,42.277 75.926,42.137 v1(77,42.137)
D_n: C11.2 J2.A7 J2.B7 R1.1 | length 9.4
  Top Layer w0.28: R1.1 74,38.505 74.25,38.755 74.25,39.245 74,39.495 74,39.505 74.25,39.755 v1@74.25,40.5 ; v1(74,40.5) 74.007,40.5 74.136,40.629 74.136,41.46 74.25,41.574 J2.A7@74.25,43 ; J2.A7 J2.A7@74.26,43.26 ; J2.B7 75.25,42.276 75.619,41.907 75.619,40.705 75.5,40.587 v1(75.5,40.5)
  Bottom Layer w0.28: v1(74,40.5) v1(75.5,40.5)
D_p: C12.2 J2.A6 J2.B6 R2.1 | length 8.4
  Top Layer w0.28: v1(73.5,41.5) 73.5,41.587 73.636,41.723 73.636,42.246 73.75,42.36 J2.B6 ; J2.A6@74.75,42.85 74.75,42.36 74.812,42.298 74.812,41.88 75.029,41.663 v1(75.029,41.577) 74.96,41.577 74.636,41.253 74.636,40.836 74.75,40.722 74.75,39.755 75,39.505 75,39.495 74.75,39.245 74.75,38.755 75,38.505 R2.1
  Bottom Layer w0.28: v1(73.5,41.5) 73.538,41.538 74.99,41.538 v1(75.029,41.577)
DR_n: R1.2 U2.1 | length 2.9
  Top Layer w0.28: U2.1 73.4,35.625 73.415,35.64 73.415,35.81 73.635,36.03 74.086,36.03 74.25,36.194 74.25,36.515 74.25,37.245 74,37.495 R1.2
DR_p: R2.2 U2.12 | length 2.9
  Top Layer w0.28: R2.2 75,37.495 74.75,37.245 74.75,36.722 74.75,36.194 74.914,36.03 75.365,36.03 75.585,35.81 75.585,35.64 75.6,35.625 U2.12
GND: C11.1 C12.1 C13.1 C14.2 C15.2 C16.1 C17.1 C18.2 J1.2 J2.A1_B12 J2.B1_A12 LED1C1.1 LED1C2.1 LED1C3.1 LED1C4.1 LED1C5.1 LED1C6.1 LED1C7.1 LED1C8.1 LED1C9.1 LED1C10.1 LED1D1.4 LED1D2.4 LED1D3.4 LED1D4.4 LED1D5.4 LED1D6.4 LED1D7.4 LED1D8.4 LED1D9.4 LED1D10.4 LED2C1.1 LED2C2.1 LED2C3.1 LED2C4.1 LED2C5.1 LED2C6.1 LED2C7.1 LED2C8.1 LED2C9.1 LED2C10.1 LED2D1.4 LED2D2.4 LED2D3.4 LED2D4.4 LED2D5.4 LED2D6.4 LED2D7.4 LED2D8.4 LED2D9.4 LED2D10.4 LED3C1.1 LED3C2.1 LED3C3.1 LED3C4.1 LED3C5.1 LED3C6.1 LED3C7.1 LED3C8.1 LED3C9.1 LED3C10.1 LED3D1.4 LED3D2.4 LED3D3.4 LED3D4.4 LED3D5.4 LED3D6.4 LED3D7.4 LED3D8.4 LED3D9.4 LED3D10.4 LED4C1.1 LED4C2.1 LED4C3.1 LED4C4.1 LED4C5.1 LED4C6.1 LED4C7.1 LED4C8.1 LED4C9.1 LED4C10.1 LED4D1.4 LED4D2.4 LED4D3.4 LED4D4.4 LED4D5.4 LED4D6.4 LED4D7.4 LED4D8.4 LED4D9.4 LED4D10.4 R5.1 R6.1 U1.31 U1.33 U2.5 U2.13
  other v1: 15.5,2 49.5,2 15.5,6.5 49.5,6.5 30.5,7 64.5,7 30.5,11.5 64.5,11.5 75.5,12.5 15.5,15.5 49.5,15.5 30.5,16 64.5,16 15.5,20 49.5,20 30.5,20.5 64.5,20.5 15.5,24.5 49.5,24.5 30.5,25 64.5,25 15.5,29 49.5,29 30.5,29.5 64.5,29.5 15.5,33.5 49.5,33.5 30.5,34 64.5,34 15.5,38 49.5,38 72,38.5 72,41.5 15.5,42.5 49.5,42.5 70.5,42.5 30.5,43 64.5,43 30.5,47.5 64.5,47.5
LED_DATA0: R4.1 U1.9 | length 22
  Top Layer w0.2: R4.1 v1(73.75,4.5) ; U1.9 v1(76.25,22.75)
  Bottom Layer w0.2: v1(73.75,4.5) 74.5,4.5 76.25,6.25 v1(76.25,22.75)
NetC16_2: C16.2 U1.20 | length 2.8
  Top Layer w0.25: C16.2 U1.20
NetJ2_A5: J2.A5 R6.2 | length 1.7
  Top Layer w0.28: J2.A5 75.76,43.24 75.76,42.738 75.81,42.688 75.81,42.58 75.98,42.41 76.036,42.41 76.2,42.246 76.2,41.8 R6.2@76.25,41.75
NetJ2_B5: J2.B5 R5.2 | length 2.5
  Top Layer w0.3: R5.2 J2.B5
NetLED1D1_3: LED1D1.3 LED1D2.1 | length 3.9
  Top Layer w0.1: LED1D1.3 65.5,6 65.5,8.5 LED1D2.1
NetLED1D2_3: LED1D2.3 LED1D3.1 | length 3.9
  Top Layer w0.1: LED1D2.3 65.5,10.5 65.5,13 LED1D3.1
NetLED1D3_3: LED1D3.3 LED1D4.1 | length 3.9
  Top Layer w0.1: LED1D3.3 65.5,15 65.5,17.5 LED1D4.1
NetLED1D4_3: LED1D4.3 LED1D5.1 | length 3.9
  Top Layer w0.1: LED1D4.3 65.5,19.5 65.5,22 LED1D5.1
NetLED1D5_3: LED1D5.3 LED1D6.1 | length 3.9
  Top Layer w0.1: LED1D5.3 65.5,24 65.5,26.5 LED1D6.1
NetLED1D6_3: LED1D6.3 LED1D7.1 | length 3.9
  Top Layer w0.1: LED1D6.3 65.5,28.5 65.5,31 LED1D7.1
NetLED1D7_3: LED1D7.3 LED1D8.1 | length 3.9
  Top Layer w0.1: LED1D7.3 65.5,33 65.5,35.5 LED1D8.1
NetLED1D8_3: LED1D8.3 LED1D9.1 | length 3.9
  Top Layer w0.1: LED1D8.3 65.5,37.5 65.5,40 LED1D9.1
NetLED1D9_3: LED1D9.3 LED1D10.1 | length 3.9
  Top Layer w0.1: LED1D9.3 65.5,42 65.5,44.5 LED1D10.1
NetLED2D1_1: LED1D10.3 LED2D1.1 | length 21.9
  Top Layer w0.1: LED2D1.1 48,47.5 49.75,49.25 64.104,49.25 65,48.354 LED1D10.3
NetLED2D1_3: LED2D1.3 LED2D2.1 | length 3.9
  Top Layer w0.1: LED2D2.1 48.5,42 48.5,44.5 LED2D1.3
NetLED2D2_3: LED2D2.3 LED2D3.1 | length 3.9
  Top Layer w0.1: LED2D3.1 48.5,37.5 48.5,40 LED2D2.3
NetLED2D3_3: LED2D3.3 LED2D4.1 | length 3.9
  Top Layer w0.1: LED2D4.1 48.5,33 48.5,35.5 LED2D3.3
NetLED2D4_3: LED2D4.3 LED2D5.1 | length 3.9
  Top Layer w0.1: LED2D5.1 48.5,28.5 48.5,31 LED2D4.3
NetLED2D5_3: LED2D5.3 LED2D6.1 | length 3.9
  Top Layer w0.1: LED2D6.1 48.5,24 48.5,26.5 LED2D5.3
NetLED2D6_3: LED2D6.3 LED2D7.1 | length 3.9
  Top Layer w0.1: LED2D7.1 48.5,19.5 48.5,22 LED2D6.3
NetLED2D7_3: LED2D7.3 LED2D8.1 | length 3.9
  Top Layer w0.1: LED2D8.1 48.5,15 48.5,17.5 LED2D7.3
NetLED2D8_3: LED2D8.3 LED2D9.1 | length 3.9
  Top Layer w0.1: LED2D9.1 48.5,10.5 48.5,13 LED2D8.3
NetLED2D9_3: LED2D9.3 LED2D10.1 | length 3.9
  Top Layer w0.1: LED2D10.1 48.5,6 48.5,8.5 LED2D9.3
NetLED3D1_1: LED2D10.3 LED3D1.1 | length 23.4
  Top Layer w0.1: LED3D1.1 31.5,4 31.5,2.146 32.896,0.75 47.25,0.75 48.5,2 48.5,4 LED2D10.3
NetLED3D1_3: LED3D1.3 LED3D2.1 | length 3.9
  Top Layer w0.1: LED3D1.3 31.5,6 31.5,8.5 LED3D2.1
NetLED3D2_3: LED3D2.3 LED3D3.1 | length 3.9
  Top Layer w0.1: LED3D2.3 31.5,10.5 31.5,13 LED3D3.1
NetLED3D3_3: LED3D3.3 LED3D4.1 | length 3.9
  Top Layer w0.1: LED3D3.3 31.5,15 31.5,17.5 LED3D4.1
NetLED3D4_3: LED3D4.3 LED3D5.1 | length 3.9
  Top Layer w0.1: LED3D4.3 31.5,19.5 31.5,22 LED3D5.1
NetLED3D5_3: LED3D5.3 LED3D6.1 | length 3.9
  Top Layer w0.1: LED3D5.3 31.5,24 31.5,26.5 LED3D6.1
NetLED3D6_3: LED3D6.3 LED3D7.1 | length 3.9
  Top Layer w0.1: LED3D6.3 31.5,28.5 31.5,31 LED3D7.1
NetLED3D7_3: LED3D7.3 LED3D8.1 | length 3.9
  Top Layer w0.1: LED3D7.3 31.5,33 31.5,35.5 LED3D8.1
NetLED3D8_3: LED3D8.3 LED3D9.1 | length 3.9
  Top Layer w0.1: LED3D8.3 31.5,37.5 31.5,40 LED3D9.1
NetLED3D9_3: LED3D9.3 LED3D10.1 | length 3.9
  Top Layer w0.1: LED3D9.3 31.5,42 31.5,44.5 LED3D10.1
NetLED4D1_1: LED3D10.3 LED4D1.1 | length 21.9
  Top Layer w0.1: LED4D1.1 14,47.5 15.75,49.25 30.104,49.25 31,48.354 LED3D10.3
NetLED4D1_3: LED4D1.3 LED4D2.1 | length 3.9
  Top Layer w0.1: LED4D2.1 14.5,42 14.5,44.5 LED4D1.3
NetLED4D2_3: LED4D2.3 LED4D3.1 | length 3.9
  Top Layer w0.1: LED4D3.1 14.5,37.5 14.5,40 LED4D2.3
NetLED4D3_3: LED4D3.3 LED4D4.1 | length 3.9
  Top Layer w0.1: LED4D4.1 14.5,33 14.5,35.5 LED4D3.3
NetLED4D4_3: LED4D4.3 LED4D5.1 | length 3.9
  Top Layer w0.1: LED4D5.1 14.5,28.5 14.5,31 LED4D4.3
NetLED4D5_3: LED4D5.3 LED4D6.1 | length 3.9
  Top Layer w0.1: LED4D6.1 14.5,24 14.5,26.5 LED4D5.3
NetLED4D6_3: LED4D6.3 LED4D7.1 | length 3.9
  Top Layer w0.1: LED4D7.1 14.5,19.5 14.5,22 LED4D6.3
NetLED4D7_3: LED4D7.3 LED4D8.1 | length 3.9
  Top Layer w0.1: LED4D8.1 14.5,15 14.5,17.5 LED4D7.3
NetLED4D8_3: LED4D8.3 LED4D9.1 | length 3.9
  Top Layer w0.1: LED4D9.1 14.5,10.5 14.5,13 LED4D8.3
NetLED4D9_3: LED4D9.3 LED4D10.1 | length 3.9
  Top Layer w0.1: LED4D10.1 14.5,6 14.5,8.5 LED4D9.3
NetLED4D10_3: LED4D10.3
NetR4_2: LED1D1.1 R4.2 | length 8.4
  Top Layer w0.1: LED1D1.1 66,4.059 65.941,4 65.705,4 65.5,3.795 65.5,3.205 66.48,2.225 68.592,2.225 70.867,4.5 R4.2
RXD: J1.5 U1.4 U2.7 | length 18.6
  Top Layer w0.25: U2.7 76.625,33.375 78,32 v1(78,19.5) 77.5,19 U1.4
  Bottom Layer w0.25: v1(78,19.5) 78.873,19.5 79.123,19.75 J1.5
SLIDER1.0: S1.4 U1.12 | length 21.5
  Top Layer w0.25: v1(69,29.5) 71.5,29.5 74.75,26.25 U1.12
  Bottom Layer w0.25: v1(60,29.5) 61,28.5 68,28.5 v1(69,29.5)
SLIDER1.1: S1.3 U1.16 | length 13.2
  Top Layer w0.25: v1(69,24) 72,24 72.75,23.25 U1.16
  Bottom Layer w0.25: v1(61.5,24) v1(69,24)
SLIDER1.2: S1.2 U1.21 | length 10.5
  Top Layer w0.25: v1(69,18) 69.042,18 70.042,19 U1.21
  Bottom Layer w0.25: v1(62,18) v1(69,18)
SLIDER1.3: S1.1 U1.25 | length 49.4
  Top Layer w0.25: v1(70,11) 72.75,13.75 U1.25
  Bottom Layer w0.25: v1(60,37) 67,37 70,34 v1(70,11) 68.5,9.5 v1(62.5,9.5)
SLIDER2.0: S2.4 U1.13 | length 37.3
  Top Layer w0.25: v1(69,28.5) 71.5,28.5 74.25,25.75 U1.13
  Bottom Layer w0.25: v1(43,29.5) 44.5,28 68.5,28 v1(69,28.5)
SLIDER2.1: S2.3 U1.17 | length 28.8
  Top Layer w0.25: v1(69,23) 71,21 U1.17
  Bottom Layer w0.25: v1(44.5,24) 45.5,23 v1(69,23)
SLIDER2.2: S2.2 U1.22 | length 28.1
  Top Layer w0.25: v1(69,17) 70.5,18.5 U1.22
  Bottom Layer w0.25: v1(45,18) 46,17 v1(69,17)
SLIDER2.3: S2.1 U1.26 | length 87
  Top Layer w0.25: v1(71,11) 73.25,13.25 U1.26
  Bottom Layer w0.25: v1(43,37) 44,38 48.687,38 49.262,37.425 49.738,37.425 50.313,38 66.566,38 71,33.566 v1(71,11) 68.5,8.5 46.5,8.5 v1(45.5,9.5)
SLIDER3.0: S3.4 U1.14 | length 53.1
  Top Layer w0.25: v1(69,27.5) 71.5,27.5 73.75,25.25 U1.14
  Bottom Layer w0.25: v1(26,29.5) 28,27.5 v1(69,27.5)
SLIDER3.1: S3.3 U1.18 | length 46.3
  Top Layer w0.25: v1(69,22) 70.5,20.5 U1.18
  Bottom Layer w0.25: v1(27.5,24) 27.5,23.5 29,22 v1(69,22)
SLIDER3.2: S3.2 U1.23 | length 46.4
  Top Layer w0.25: v1(69,16) 71,18 U1.23
  Bottom Layer w0.25: v1(28,18) 28,17 28.5,16.5 30.187,16.5 30.262,16.575 64.738,16.575 64.813,16.5 68.5,16.5 v1(69,16)
SLIDER3.3: S3.1 U1.27 | length 123.2
  Top Layer w0.25: v1(72,11) 73.75,12.75 U1.27
  Bottom Layer w0.25: v1(26,37) 27.5,38.5 49.187,38.5 49.262,38.575 49.738,38.575 49.813,38.5 66.631,38.5 72,33.131 v1(72,11) 69.1,8.1 29.4,8.1 28.5,9 v1(28.5,9.5)
SLIDER4.0: S4.4 U1.15 | length 69.2
  Top Layer w0.25: v1(69,26.5) 71.5,26.5 73.25,24.75 U1.15
  Bottom Layer w0.25: v1@9.107,29.393 12,26.5 v1(69,26.5)
  other v1: 9,29.5
SLIDER4.1: S4.3 U1.19 | length 64.1
  Top Layer w0.25: v1(69,21) 69.042,21 70.042,20 U1.19
  Bottom Layer w0.25: v1(10.5,24) 10.5,22.5 11.5,21.5 68.5,21.5 v1(69,21)
SLIDER4.2: S4.2 U1.24 | length 65
  Top Layer w0.25: v1(69,15) 69.275,15 71.775,17.5 U1.24
  Bottom Layer w0.25: v1(11,18) 11,16 12.5,14.5 68.5,14.5 v1(69,15)
SLIDER4.3: S4.1 U1.28 | length 159.7
  Top Layer w0.25: v1(73,11) 74.25,12.25 U1.28
  Bottom Layer w0.25: v1(9,37) 10.975,38.975 66.722,38.975 73,32.697 v1(73,11) 69.7,7.7 12.3,7.7 11.5,8.5 v1(11.5,9.5)
SWTCK: J1.4 U1.2 | length 6.6
  Top Layer w0.25: U1.2 81.75,18 v1(82.25,18.5)
  Bottom Layer w0.25: J1.4 81.26,18.49 82.24,18.49 v1(82.25,18.5)
SWTDIO: J1.1 R3.1 U1.1 | length 5.6
  Top Layer w0.25: U1.1 77.225,17.5 v1(78,16.725) R3.1
  Bottom Layer w0.25: v1(78,16.725) 78.485,17.21 J1.1
TXD: J1.3 U1.3 U2.10 | length 21.8
  Top Layer w0.25: U2.10 78.204,34.725 78.575,34.354 78.575,19.262 78.567,19.254 78.567,18.817 v1(78.5,18.75) 78.405,18.75 78.155,18.5 U1.3
  Bottom Layer w0.25: v1(78.5,18.75) 78.77,18.48 J1.3
pads on no net: FID1.0 FID2.0 FID3.0 J1. J2.0 J2.A8 J2.B8 U1.5 U1.6 U1.7 U1.8 U1.10 U1.11 U1.29 U1.30 U2.6 U2.8 U2.11

## Polygon pours and split planes (outlines as drawn)
GND on Bottom Layer "GND_L02_P001" (hatched 45Degree grid 0.8 track 0.2, remove dead copper, pour order 1): -6,0 -6,50 84,50 84,0
GND on Top Layer "GND_L01_P000" (hatched 45Degree grid 0.8 track 0.2, remove dead copper, pour order 0): -6,0 -6,50 84,50 84,0

## Silkscreen, mask and mechanical layers (free items; w line width, h text height)
Top Overlay:
  rectangle: 0,2 12,48
  rectangle: 17,2 29,48
  rectangle: 51,2 63,48
  rectangle: 34,2 46,48
  lines w0.1: 0,0 0,50 ; 17,0 17,50 ; 34,0 34,50 ; 51,0 51,50 ; 68,0 68,50
Mechanical 1:
  circle w0.1: c-2.5,150.5 r1.1
  circle w0.1: c-2.5,107.5 r1.1
  circle w0.1: c80.5,107.5 r1.1
  circle w0.1: c80.5,144 r1.1
  circle w0.1: c79.599,125.02 r0.5
  circle w0.1: c81.631,125.02 r0.5
  circle w0.1: c80.615,119.94 r0.5
  circle w0.1: c-2.5,98.5 r1.1
  circle w0.1: c-2.5,55.5 r1.1
  circle w0.1: c80.5,55.5 r1.1
  circle w0.1: c80.5,92 r1.1
  circle w0.1: c79.599,73.02 r0.5
  circle w0.1: c81.631,73.02 r0.5
  circle w0.1: c80.615,67.94 r0.5
  circle w0.1: c80.5,3.5 r1.1
  circle w0.1: c-2.5,3.5 r1.1
  lines w0.1: 68.14,50 -2.5,50 ccw(c-2.5,46.5) -6,46.5 -6,3.5 ccw(c-2.5,3.5) -2.5,0 80.5,0 ccw(c80.5,3.5) 84,3.5 84,46.5 ; 69,50 69,50.5 ; 80.5,50 cw(c80.5,46.5) 84,46.5 ; -6,55.5 ccw(c-2.5,55.5) -2.5,52 80.5,52 ccw(c80.5,55.5) 84,55.5 84,98.5 ccw(c80.5,98.5) 82.975,100.975 81,99 81,95.5 cw(c80,95.5) 80,94.5 78.5,94.5 78.5,85 cw(c77.5,85) 77.5,84 67,84 67,72.5 69.5,72.5 cw(c69.5,71.5) 69.5,70.5 67,70.5 67,56 cw(c65.5,56) 64,56 64,97.5 cw(c65.5,97.5) 67,97.5 67,94.5 68.14,94.5 68.14,101 ccw(c67.14,101) 67.14,102 -2.5,102 ccw(c-2.5,98.5) -6,98.5 -6,55.5 ; -6,107.5 ccw(c-2.5,107.5) -2.5,104 80.5,104 ccw(c80.5,107.5) 84,107.5 84,150.5 ccw(c80.5,150.5) 80.5,154 80.12,154 ccw(c80.12,153) 79.12,153 79.12,148.3 cw(c78.12,148.3) 78.12,147.3 70.88,147.3 cw(c70.88,148.3) 69.88,148.3 69.88,153 ccw(c68.88,153) 68.88,154 -2.5,154 ccw(c-2.5,150.5) -6,150.5 -6,107.5 ; 13,56 ccw(c14.5,56) 16,56 16,97.5 ccw(c14.5,97.5) 13,97.5 13,56 ; 13,108 ccw(c14.5,108) 16,108 16,149.5 ccw(c14.5,149.5) 13,149.5 13,108 ; 30,56 ccw(c31.5,56) 33,56 33,97.5 ccw(c31.5,97.5) 30,97.5 30,56 ; 30,108 ccw(c31.5,108) 33,108 33,149.5 ccw(c31.5,149.5) 30,149.5 30,108 ; 47,56 ccw(c48.5,56) 50,56 50,97.5 ccw(c48.5,97.5) 47,97.5 47,56 ; 47,108 ccw(c48.5,108) 50,108 50,149.5 ccw(c48.5,149.5) 47,149.5 47,108 ; 64,108 ccw(c65.5,108) 67,108 67,149.5 ccw(c65.5,149.5) 64,149.5 64,108 ; 71,69 ccw(c72,69) 72,68 73.5,68 cw(c73.5,67) 74.5,67 ccw(c75.5,67) 75.5,66 77,66 77,65.5 ccw(c78,65.5) 79,65.5 79,67 ccw(c78,67) 78,68 78,73.5 ccw(c77,73.5) 77,74.5 72,74.5 ccw(c72,73.5) 71,73.5 71,69
Mechanical 2:
  lines w0.1: -6,3.5 ccw(c-2.5,3.5) -2.5,0 80.5,0 ccw(c80.5,3.5) 84,3.5 84,46.5 ccw(c80.5,46.5) 80.5,50 79.12,50 79.12,43.8 cw(c78.72,43.8) 78.32,43.8 70.68,43.8 cw(c70.28,43.8) 69.88,43.8 69.88,50 -2.5,50 ccw(c-2.5,46.5) -6,46.5 -6,3.5